# EAGLE board BoardMKI (EAGLE 9.1.3)

Size 132.06 x 100 mm. Coordinates in mm from the lower left corner, seen from the top.
Outline: 0,0 132.06,0 132.06,100 0,100 0,0
Copper layers (1*16): Top 0.035mm / dielectric 1.5mm / Bottom 0.035mm
Design rules "default": minimum track width 6mil, minimum drill 0.35mm, track to track 6mil, track to pad 6mil, pad to pad 6mil, via to via 6mil, smd to smd 6mil, copper to edge 40mil, drill to drill 6mil, minimum pad ring 10mil, minimum via ring 8mil, stop-mask expansion 4mil, vias tented up to drill 0mil, thermal gap 10mil

## Footprints (pad centres in the part's own frame; a part is rotated, then mirrored left to right if it is on the bottom)
DO41-10 = drill 1.118: A 5.08,0; C -5.08,0
SMKDSP_1,5/2 = drill 1.6 pad 1.8 long: 1 -2.5,0; 2 2.5,0
P-TO220-7-11 = drill 0.8 pad 1.2 long: 1 -3.81,-1.85; 2 -2.54,-5.75; 3 -1.27,-1.85; 4 0,-5.75; 5 1.27,-1.85; 6 2.54,-5.75; 7 3.81,-1.85
G5LE = drill 1.321 long: 1 -7.493,-5.969; 2 -7.493,5.969; O 4.699,5.969; P -9.525,0; S 4.699,-5.969
0207/12 = drill 0.813 octagon: 1 -6.35,0; 2 6.35,0
TO92 = drill 0.813 octagon: 1 1.27,0; 2 0,1.905; 3 -1.27,0
ELECTRON = drill 1.016 pad 1.88: 1 1.27,46.99; 2 1.27,44.45; 3 1.27,41.91; 4 1.27,39.37; 5 1.27,36.83; 6 1.27,34.29; 7 1.27,31.75; 8 1.27,29.21; 9 1.27,26.67; 10 1.27,24.13; 11 1.27,21.59; 12 1.27,19.05; 13 1.27,16.51; 14 1.27,13.97; 15 1.27,11.43; 16 1.27,8.89; 17 1.27,6.35; 18 1.27,3.81; 19 19.05,3.81; 20 19.05,6.35; 21 19.05,8.89; 22 19.05,11.43; 23 19.05,13.97; 24 19.05,16.51; 25 19.05,19.05; 26 19.05,21.59; 27 19.05,24.13; 28 19.05,26.67; 29 19.05,29.21; 30 19.05,31.75; 31 19.05,34.29; 32 19.05,36.83; 33 19.05,39.37; 34 19.05,41.91; 35 19.05,44.45; 36 19.05,46.99
DIP3302W60P254L2400H500Q20B = drill 1.048 pad 1.649 long: CS -16.51,3.81; ENA -16.51,8.89; ENB -16.51,1.27; GND1 -16.51,-6.35; GND2 -16.51,-11.43; GND3 16.51,1.27; GND4 16.51,-1.27; INA -16.51,11.43; INB -16.51,-1.27; OUTA1 16.51,11.43; OUTA2 16.51,8.89; OUTB1 16.51,6.35; OUTB2 16.51,3.81; PWM -16.51,6.35; VDD -16.51,-3.81; VIN1 16.51,-3.81; VIN2 16.51,-6.35; VOUT -16.51,-8.89

## Placement (x,y rotation side)
D1  1N4004  [DO41-10]  16.51,45.72 90 top
D2  1N4004  [DO41-10]  86.36,69.85 90 top
D3  1N4004  [DO41-10]  16.51,68.58 90 top
FAN  SMKDSP_1,5/2  [SMKDSP_1,5/2]  22.86,7.62 0 top
IC1  TLE5205-2  [P-TO220-7-11]  85.09,53.34 90 top
K1  G5LE  [G5LE]  31.75,44.45 0 top
K2  G5LE  [G5LE]  100.33,68.58 0 top
K3  G5LE  [G5LE]  31.75,67.31 0 top
MOTOR1  SMKDSP_1,5/2  [SMKDSP_1,5/2]  124.46,53.34 90 top
PELTIER1  SMKDSP_1,5/2  [SMKDSP_1,5/2]  -21.59,-24.13 0 top  (outside the outline)
PUMP  SMKDSP_1,5/2  [SMKDSP_1,5/2]  33.02,7.62 0 top
R1  [0207/12]  8.89,40.64 90 top
R2  [0207/12]  77.47,63.5 90 top
R3  [0207/12]  5.08,40.64 90 top
R4  [0207/12]  5.08,63.5 90 top
R5  [0207/12]  8.89,63.5 90 top
R6  [0207/12]  81.28,63.5 90 top
R7  [0207/12]  72.39,52.07 0 top
R8  [0207/12]  72.39,54.61 0 top
T1  2N3704  [TO92]  8.89,50.8 270 top
T2  2N3704  [TO92]  77.47,74.93 270 top
T3  2N3704  [TO92]  8.89,73.66 270 top
U$1  ELECTRON_WITH_HEADERS  [ELECTRON]  -49.53,-26.67 0 top  (outside the outline)
U$2  VNH5019VNH5019BOARD  [DIP3302W60P254L2400H500Q20B]  100.33,22.86 0 top

## Library data of the parts
D1-D3 = diode
FAN MOTOR1 PELTIER1 PUMP = con-phoenix-smkdsp; MF: FARNELL; MPN: 1733570; OC_FARNELL: 3041244; OC_NEWARK: 69C8588
IC1 = infineon; OC_FARNELL: unknown; OC_NEWARK: unknown
K1-K3 = relay; OC_FARNELL: unknown; OC_NEWARK: unknown
R1-R8 = resistor
T1-T3 = transistor
U$1 = Particle-Devices
U$2 = GEMS

## Nets
3V3: U$1.36
+12V: D1.C D2.C D3.C K1.1 K1.S K2.1 K2.S K3.1 K3.S U$2.VIN1 U$2.VIN2
C0: R8.1 U$1.19
C1: R7.1 U$1.20
C2: R2.1 U$1.21
GND: FAN.2 IC1.4 PUMP.2 R3.1 R4.1 R6.1 T1.3 T2.3 T3.3 U$1.2 U$1.33 U$2.GND1 U$2.GND2 U$2.GND3 U$2.GND4
N$1: R1.2 R3.2 T1.1
N$2: D1.A K1.2 T1.2
N$3: D2.A K2.2 T2.2
N$4: IC1.6 K2.P
N$5: FAN.1 K1.P
N$6: IC1.1 MOTOR1.1
N$7: IC1.7 MOTOR1.2
N$8: R2.2 R6.2 T2.1
N$9: D3.A K3.2 T3.2
N$10: IC1.3 R7.2
N$11: K3.P PUMP.1
N$12: R4.2 R5.2 T3.1
N$13: IC1.5 R8.2
N$16: PELTIER1.2 U$2.OUTB1 U$2.OUTB2
N$17: PELTIER1.1 U$2.OUTA1 U$2.OUTA2
N$20: U$1.22
N$21: U$1.23
N$22: U$1.24
N$23: U$1.25
N$24: U$1.26
N$25: U$1.27
N$26: U$1.28
N$27: U$1.18
N$28: U$1.17
N$29: U$1.16
N$30: U$1.15
VBAT: U$1.34
VIN: U$1.1

## Tracks (layer width: path | path; a pad name or v marks a point on that pad's centre or on a via)
+12V  (10 unrouted)
C0  (1 unrouted)
C1  (1 unrouted)
C2  (1 unrouted)
GND  (14 unrouted)
N$1  (2 unrouted)
N$2  (2 unrouted)
N$3  (2 unrouted)
N$4  (1 unrouted)
N$5  (1 unrouted)
N$6  (1 unrouted)
N$7  (1 unrouted)
N$8  (2 unrouted)
N$9  (2 unrouted)
N$10  (1 unrouted)
N$11  (1 unrouted)
N$12  (2 unrouted)
N$13  (1 unrouted)
N$16  (2 unrouted)
N$17  (2 unrouted)